# Altium PCB MSB.PcbDoc
Units mil, origin at the board's own origin, x right, y up, seen from the top; angles counter-clockwise.
Board outline 1540 x 1600 mil, 2 copper layers (Top Layer, Bottom Layer); 25 components, 22 nets, 112 pads, 13 vias.
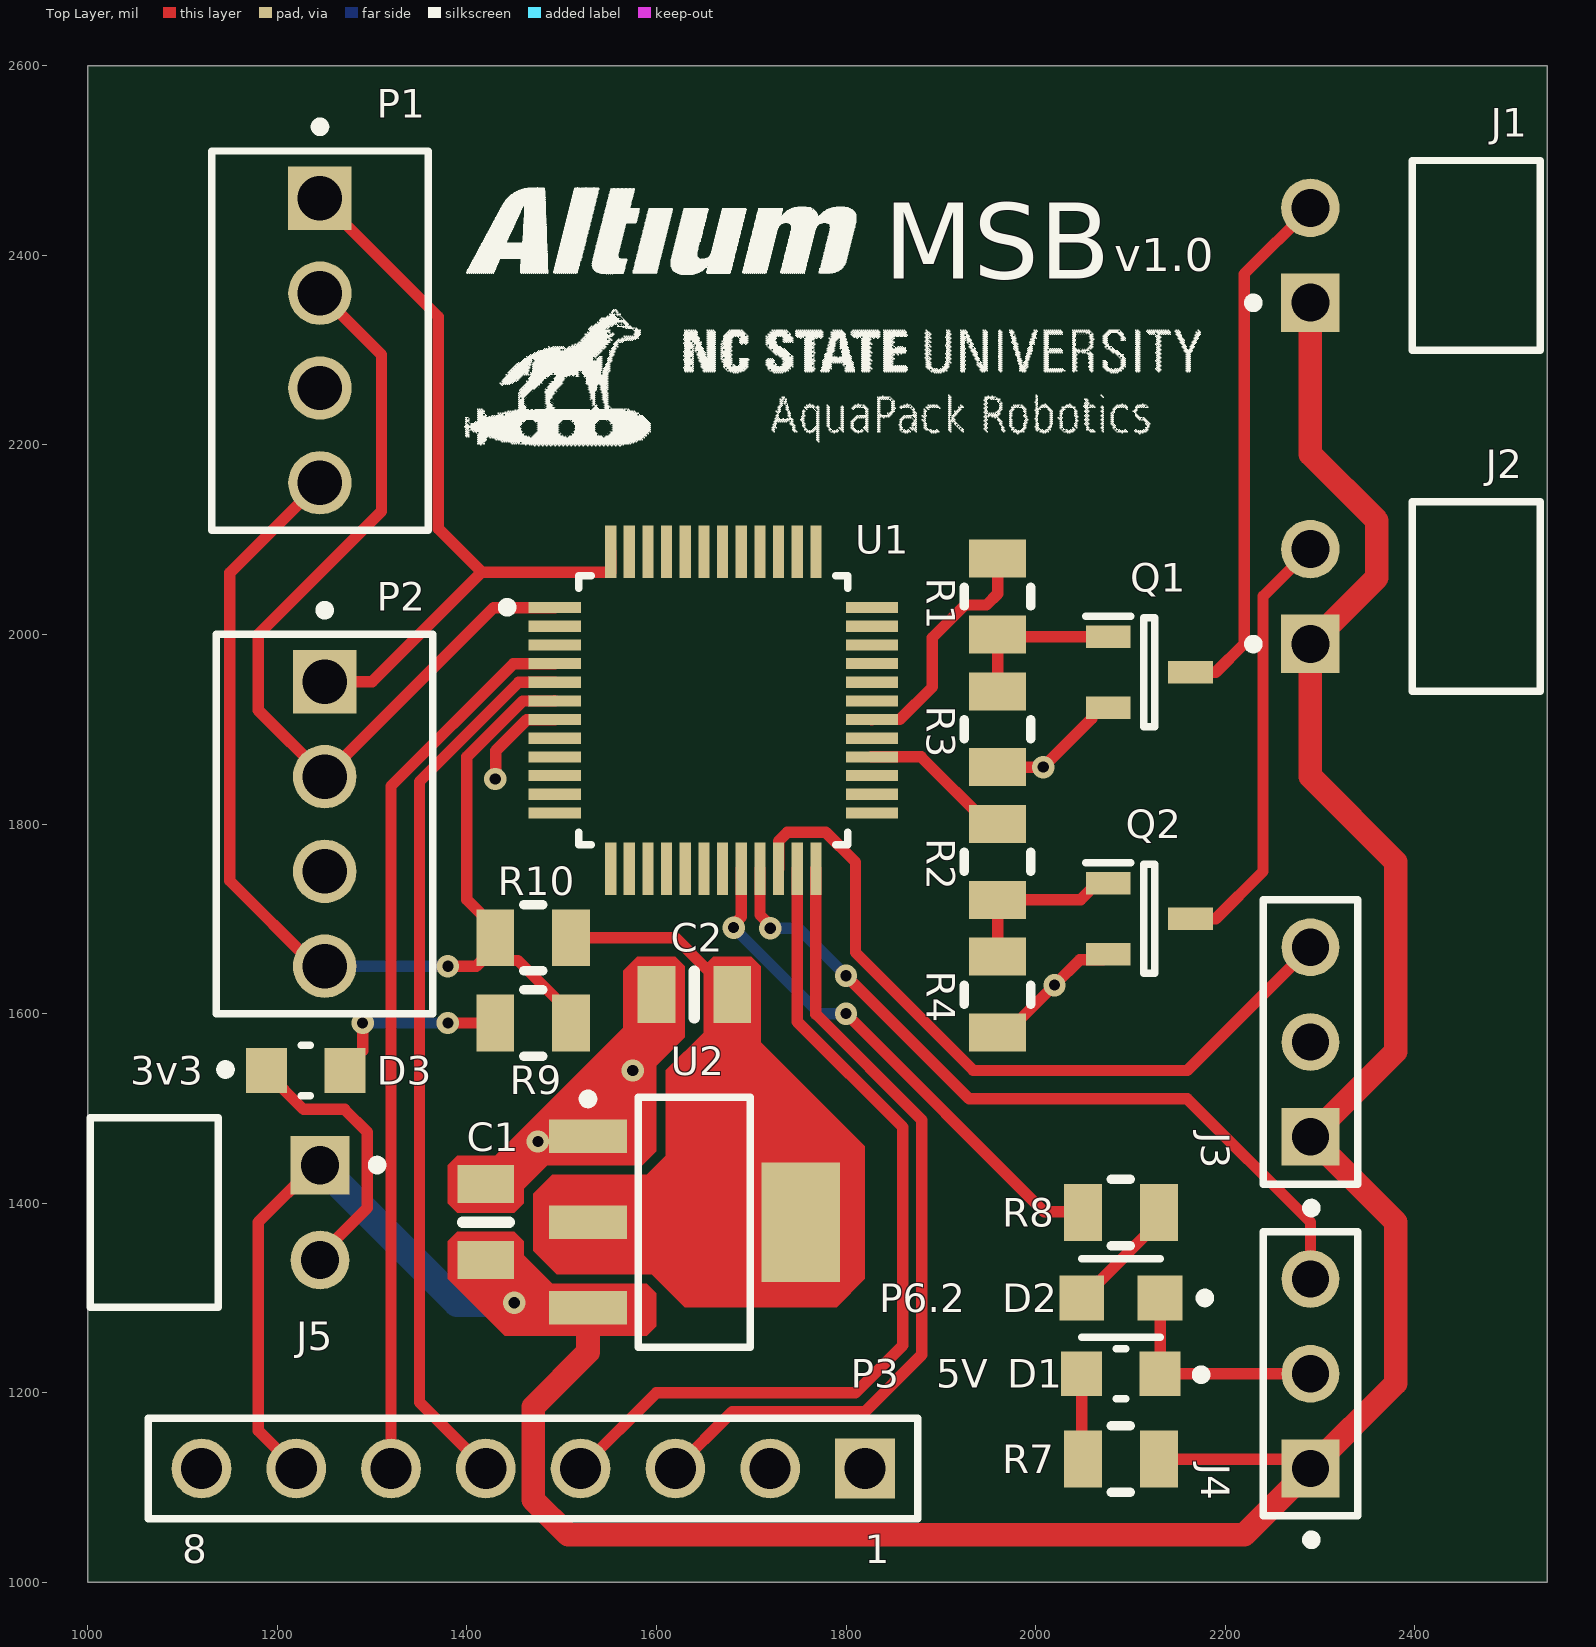
[diagram p0: Top Layer view]
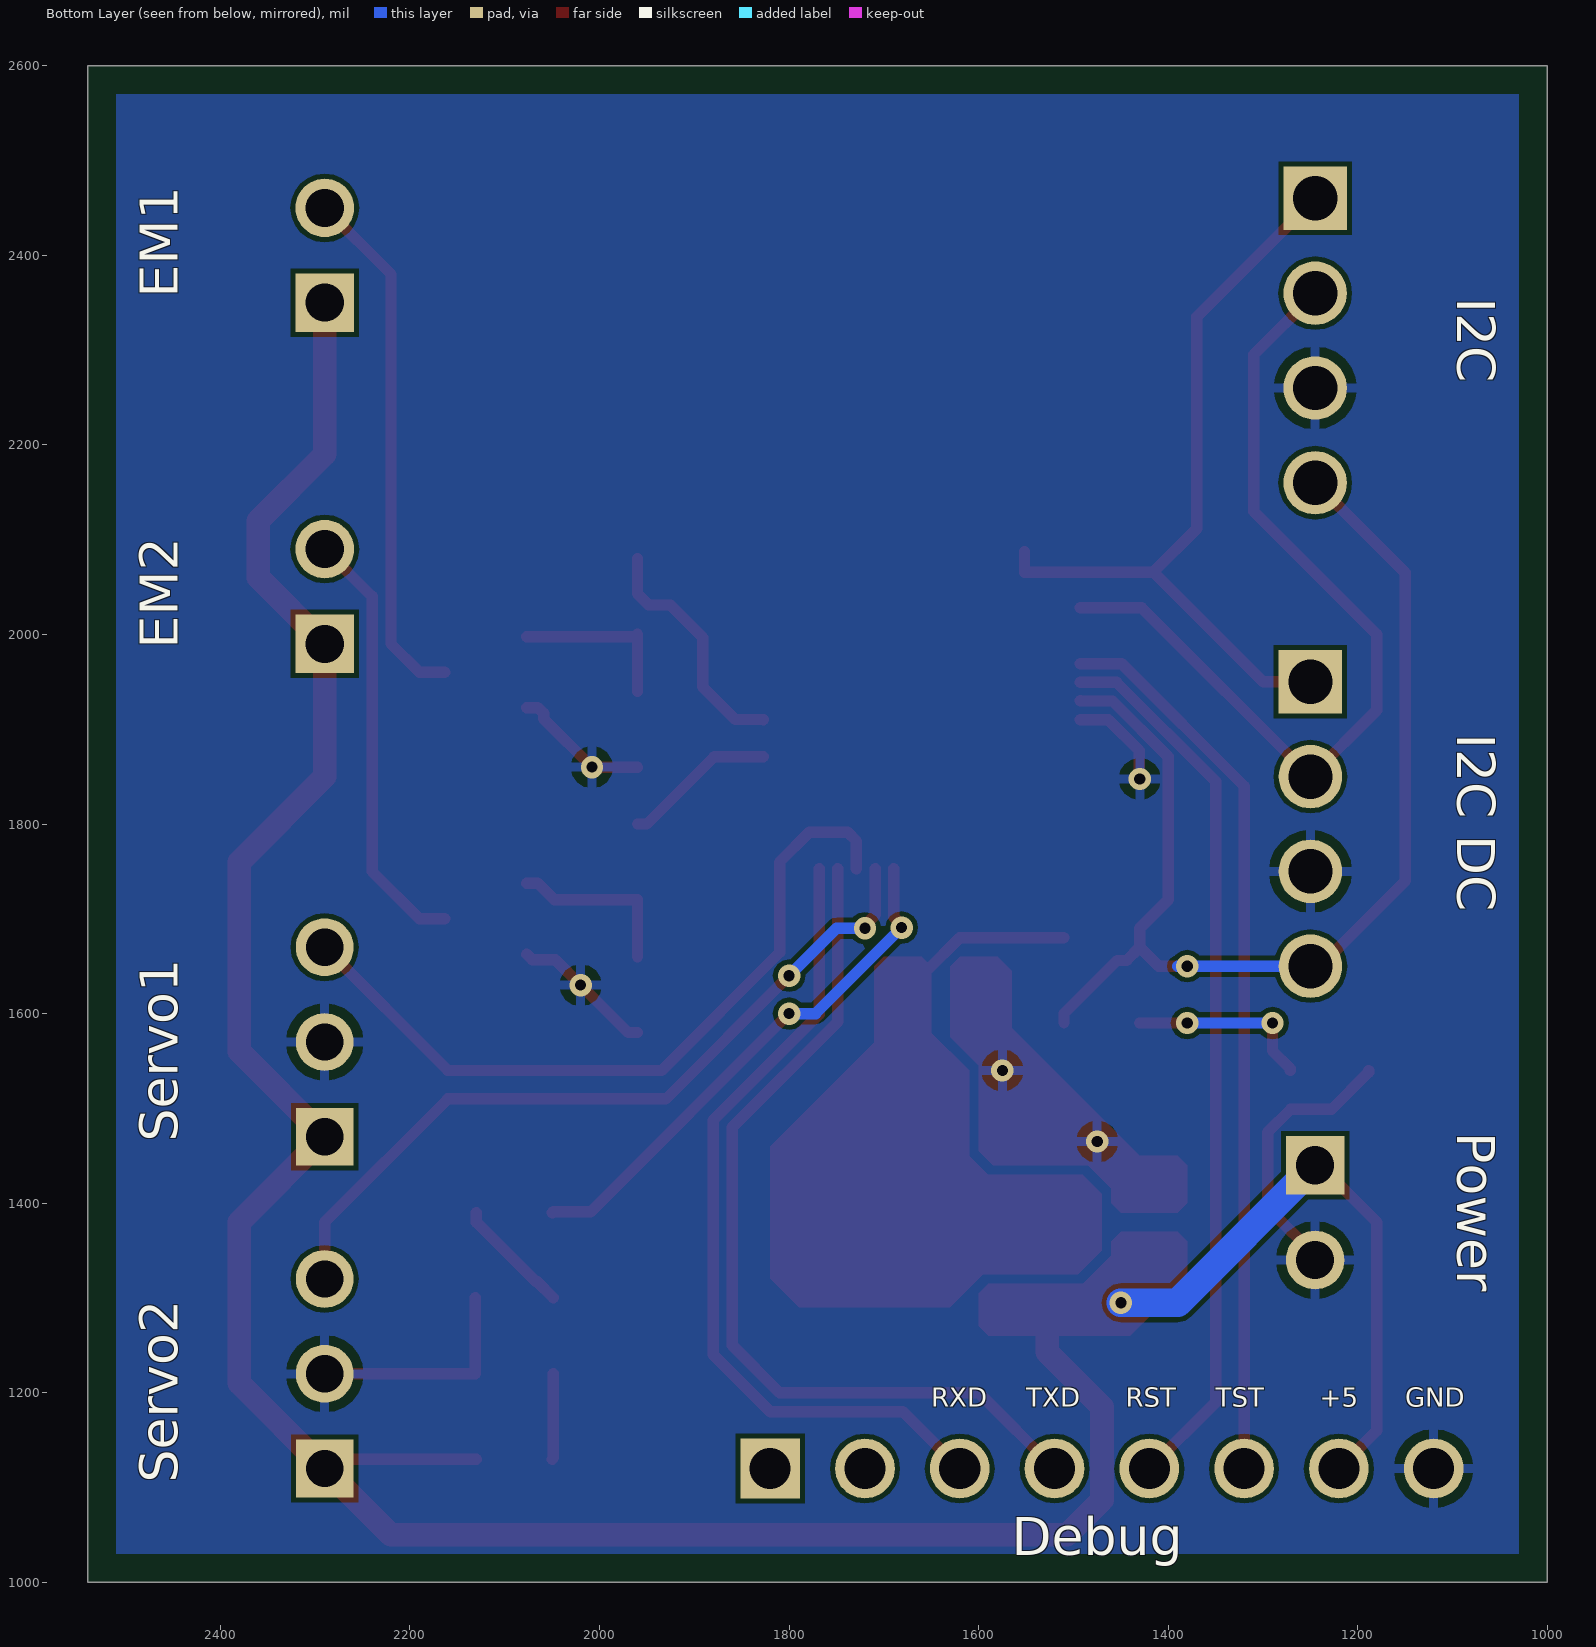
[diagram p1: Bottom Layer view, seen from below]
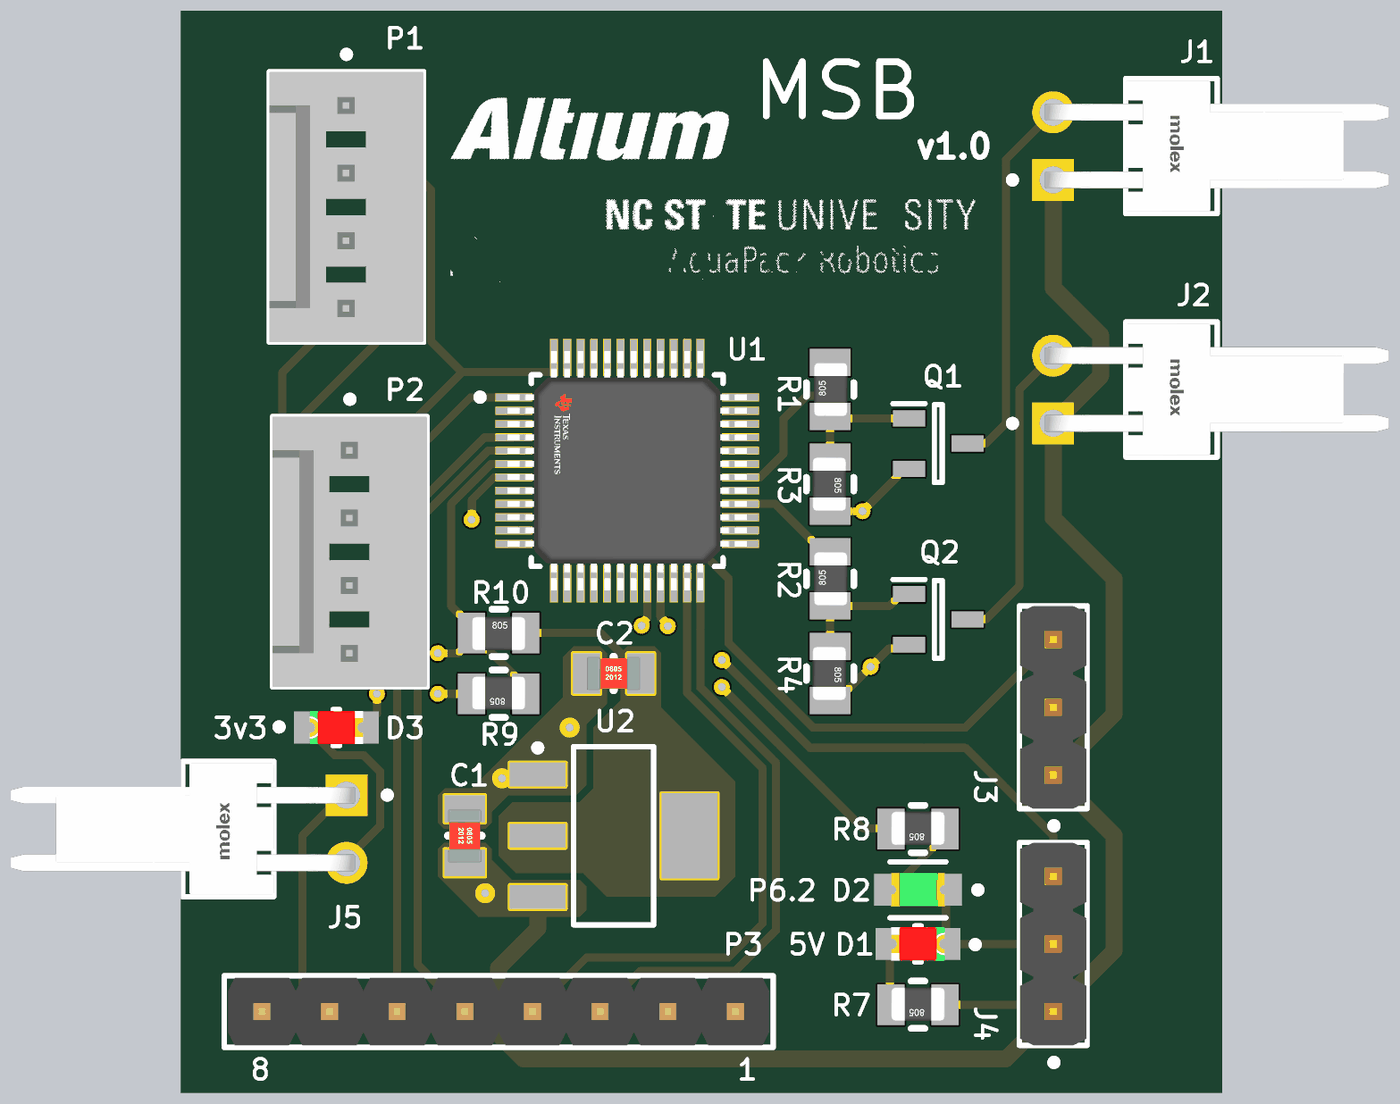
[diagram p2: 3D render of the assembled board from above, using the file's embedded part models]

## Layer stack, top to bottom
Top Solder: solder mask 0.4, Solder Resist, Dk 3.5
Top Layer: signal copper 1.4
Dielectric 1: dielectric 12.6, FR-4, Dk 4.8
Bottom Layer: signal copper 1.4
Bottom Solder: solder mask 0.4, Solder Resist, Dk 3.5

## Board outline
1000,1000 2540,1000 2540,2600 1000,2600

## Design rules (kind name [scope] priority, off if disabled: settings)
BoardOutlineClearance [All] p1: gap=7.87 ignorepadtopadclearanceinfootprint=FALSE
Clearance [All] p1: gap=5 ignorepadtopadclearanceinfootprint=FALSE except(9.84: Arc-Hole Track-Hole SMDPad-Hole THPad-Hole Via-Hole Fill-Hole Poly-Hole Region-Hole Text-Hole)
ComponentClearance [All] p1: gap=5 collisioncheckmode=3 verticalgap=5 showdistances=TRUE
DiffPairsRouting [All] p1: maxlimit=10 minlimit=5 mostfreqgap=5 toplayer_minwidth=5 toplayer_maxwidth=1000 toplayer_prefwidth=5 bottomlayer_minwidth=5 bottomlayer_maxwidth=1000 bottomlayer_prefwidth=5 maxuncoupledlength=500
Height [All] p1: minheight=0 maxheight=71497.94 prefheight=500
HoleSize [All] p1: absolutevalues=TRUE maxlimit=248.03 minlimit=11.81 maxpercent=80.000 minpercent=20.000
HoleToHoleClearance [All] p1: gap=9.84 allowstackedmicrovias=FALSE
MinimumAnnularRing [All] p1: minimumring=3
MinimumSolderMaskSliver [All] p1: minsoldermaskwidth=0
PlaneClearance [All] p1: clearance=5
PlaneConnect PlaneConnectPowerPads [InPadClass('PowerPads')] p1: planeconnectstyle=Direct reliefexpansion=20 reliefentries=4 reliefconductorwidth=10 reliefairgap=10
PlaneConnect [All] p2: pad.planeconnectstyle=Relief pad.reliefexpansion=11.81 pad.reliefentries=4 pad.reliefconductorwidth=5 pad.reliefairgap=5 via.planeconnectstyle=Direct via.reliefexpansion=11.81 via.reliefentries=4 via.reliefconductorwidth=5 via.reliefairgap=5
PolygonConnect PolygonConnect_1 [All] p1: connectstyle=Relief reliefconductorwidth=10 reliefentries=4 polygonreliefangle="90 Angle" airgapwidth=10
PolygonConnect PolygonDirect [(IsNamedPolygon('PolygonDirect'))] p2: connectstyle=Direct reliefconductorwidth=10 reliefentries=4 polygonreliefangle="90 Angle" airgapwidth=10
PolygonConnect [All] p3: thpad.connectstyle=Relief thpad.reliefconductorwidth=5 thpad.reliefentries=4 thpad.polygonreliefangle="90 Angle" thpad.airgapwidth=5 smdpad.connectstyle=Relief smdpad.reliefconductorwidth=5 smdpad.reliefentries=4 smdpad.polygonreliefangle="90 Angle" smdpad.airgapwidth=5 via.connectstyle=Direct via.reliefconductorwidth=5 via.reliefentries=4 via.polygonreliefangle="90 Angle" via.airgapwidth=5
RoutingVias [All] p1: holewidth=11.81 width=23.62 viastyle="Through Hole" minholewidth=11.81 minwidth=23.62 maxholewidth=23.62 maxwidth=259.84
SilkToSilkClearance [All] p1: silktosilkclearance=0
SilkToSolderMaskClearance [IsPad] p1: minsilkscreentomaskgap=5 clearancetoexposedcopper=TRUE
SolderMaskExpansion [All] p1: expansion=2.95 istentingtop=FALSE
Width [All] p1: maxlimit=1000 minlimit=12 preferedwidth=12 minimp=50.000000 maximp=50.000000 favimp=50.000000
20 further rules are at their usual default settings.

## Components (designator, comment, footprint, x,y, rotation, side; value= is the part's Value field where it differs from the comment)
C1 "100pF" SMD-0805C 1420,1380 r180 top
C2 "10µF" SMD-0805C 1640,1620 r270 top
D1 "1.9V" FP-150080SS75000-MFG 2090,1220 r180 top
D2 "2.2V" FP-LTST-C171GKT-MFG 2090,1300 r180 top value=2.1V
D3 "1.9V" FP-150080SS75000-MFG 1230,1540 r0 top
J1 "22-05-3021" FP-22-05-3021-MFG 2460,2400 r90 top
J2 "22-05-3021" FP-22-05-3021-MFG 2460,2040 r90 top
J3 "90120-0763" FP-90120-0763-MFG 2290,1570 r90 top
J4 "90120-0763" FP-90120-0763-MFG 2290,1220 r90 top
J5 "22-05-3021" FP-22-05-3021-MFG 1075,1390 r270 top
P1 "22-27-2041" MOLX-22-27-2041_V 1245,2310 r90 top
P2 "22-27-2041" MOLX-22-27-2041_V 1250,1800 r90 top
P3 "61300811121" 61300811121 1470,1120 r180 top
Q1 "FDN5632N-F085" SOT95P237X122-3N 2120,1960 r0 top
Q2 "FDN5632N-F085" SOT95P237X122-3N 2120,1700 r0 top
R1 "200" SMD-0805-RES 1960,2040 r0 top
R2 "200" SMD-0805-RES 1960,1760 r0 top
R3 "10k" SMD-0805-RES 1960,1900 r180 top
R4 "10k" SMD-0805-RES 1960,1620 r180 top
R7 "309" SMD-0805-RES 2090,1130 r90 top
R8 "76.8" SMD-0805-RES 2090,1390 r90 top
R9 "140" SMD-0805-RES 1470,1590 r90 top
R10 "0.0" SMD-0805-RES 1470,1680 r270 top
U1 "MSP430FR2355TPTR" FP-PT0048A-MFG 1660,1920 r0 top
U2 "LD1117S33TR" SOT-223_L 1640,1380 r0 top

## Footprints (in the part's own frame and the unit in brackets; to place one, negate y for a bottom-side part, rotate by r counter-clockwise, add the part's x,y. Pads: shape width x height; smd on the part's side, far side on the other; paste and mask are expansions set on the pad)
61300811121 [mm] "Pin Header, pitch 2.54 mm, THT, Vertical, single row, 8p"
  rect 1.6x1.6 hole 1.1: 1(-8.89,0)
  round 1.6 hole 1.1: 2(-6.35,0) 3(-3.81,0) 4(-1.27,0) 5(1.27,0) 6(3.81,0) 7(6.35,0) 8(8.89,0)
  silkscreen extent -10.31,-1.35 10.31,1.35, body extent -10.16,-1.27 10.16,1.27, height 8.57
FP-22-05-3021-MFG [mm]
  rect 1.57x1.57 hole 1.02 paste-1000 mask+0: 1(-1.27,4.32)
  round 1.57 hole 1.02 paste-1000 mask+0: 2(1.27,4.32)
  silkscreen extent -2.54,-1.84 2.54,5.97, body extent -2.64,-8.9 2.64,5.21, height 0.25
FP-90120-0763-MFG [mm]
  rect 1.55x1.55 hole 1 paste-1000 mask+0: 1(-2.54,0)
  round 1.55 hole 1 paste-1000 mask+0: 2(0,0) 3(2.54,0)
  silkscreen extent -4.57,-1.27 3.81,1.27, body extent -3.91,-1.37 3.91,1.37, height 0.25
FP-150080SS75000-MFG [mm]
  rect 1.1x1.2 smd paste+0 mask+0: 1(-1.05,0) 2(1.05,0)
  silkscreen extent -2.28,-0.67 0.13,0.67, body extent -1.7,-0.77 1.7,0.77, height 0.25
FP-LTST-C171GKT-MFG [mm]
  rect 1.2x1.2 smd paste+0 mask+0: 1(-1.05,0) 2(1.05,0)
  silkscreen extent -2.38,-1.05 1.05,1.05, body extent -1.75,-0.77 1.75,0.77, height 0.25
FP-PT0048A-MFG [mm]
  rect 1.4x0.3 smd paste-1000 mask+0: 1(-4.25,2.75) 2(-4.25,2.25) 3(-4.25,1.75) 4(-4.25,1.25) 5(-4.25,0.75) 6(-4.25,0.25) 7(-4.25,-0.25) 8(-4.25,-0.75) 9(-4.25,-1.25) 10(-4.25,-1.75) 11(-4.25,-2.25) 12(-4.25,-2.75) 25(4.25,-2.75) 26(4.25,-2.25) 27(4.25,-1.75) 28(4.25,-1.25) 29(4.25,-0.75) 30(4.25,-0.25) 31(4.25,0.25) 32(4.25,0.75) 33(4.25,1.25) 34(4.25,1.75) 35(4.25,2.25) 36(4.25,2.75)
  rect 0.3x1.4 smd paste-1000 mask+0: 13(-2.75,-4.25) 14(-2.25,-4.25) 15(-1.75,-4.25) 16(-1.25,-4.25) 17(-0.75,-4.25) 18(-0.25,-4.25) 19(0.25,-4.25) 20(0.75,-4.25) 21(1.25,-4.25) 22(1.75,-4.25) 23(2.25,-4.25) 24(2.75,-4.25) 37(2.75,4.25) 38(2.25,4.25) 39(1.75,4.25) 40(1.25,4.25) 41(0.75,4.25) 42(0.25,4.25) 43(-0.25,4.25) 44(-0.75,4.25) 45(-1.25,4.25) 46(-1.75,4.25) 47(-2.25,4.25) 48(-2.75,4.25)
  silkscreen extent -5.65,-3.6 3.6,3.6, body extent -5.05,-5.05 5.05,5.05, height 0.25
MOLX-22-27-2041_V [mm] "CONN, 4-Leads, Body 10.16x5.8mm, Pitch 2.54mm"
  rect 1.7x1.7 hole 1.19: 1(3.81,0)
  round 1.7 hole 1.19: 2(1.27,0) 3(-1.27,0) 4(-3.81,0)
  silkscreen extent -5.08,-2.9 5.85,2.9, body extent -5.08,-2.9 5.08,2.9, height 11.7
SMD-0805-RES [mil]
  rect 60x40 smd: 1(0,40) 2(0,-40)
  silkscreen extent -35,-10 35,10, body extent -24,-39 26,39, height 31
SMD-0805C [mil]
  rect 60x40 smd: 1(0,40) 2(0,-40)
  silkscreen extent -25,0 25,0, body extent -25,-39 25,39, height 35
SOT95P237X122-3N [mm]
  rect 1.2x0.6 smd: 1(-1.1,0.95) 2(-1.1,-0.95) 3(1.1,0)
  silkscreen extent -1.7,-1.46 0.15,1.5
SOT-223_L [mm] "SOT223, 4-Leads, Body 6.5x3.5mm, Pitch 2.3mm, Lead Span 7mm, IPC High Density"
  rect 2.1x0.9 smd: 1(-2.85,2.3) 2(-2.85,0) 3(-2.85,-2.3)
  rect 2.1x3.2 smd: 4(2.85,0)
  silkscreen extent -2.97,-3.35 1.5,3.42, body extent -1.85,-3.35 1.85,3.35, height 1.8

## Part data
C1: library part GQM2195C1H101JB01D, "CAP CER 100PF 50V NP0 0805", Manufacturer="Murata Electronics North America", Operating Temperature="-55°C ~ 125°C", Package / Case="0805 (2012 Metric)", Tolerance=±5%, Datasheet URL=http://www.murata.com/~/media/webrenewal/support/library/catalog/products/capacitor/mlcc/c02e.pdf, Manufacturer Part Number=GQM2195C1H101JB01D, Mount="Surface Mount, MLCC", Packaging="Cut Tape (CT)", Quantity Available=5437, Unit Price (USD)=1.22
C2: library part GCJ21BR71A106KE01L, "CAP CER 10UF 10V X7R 0805", Manufacturer="Murata Electronics North America", Operating Temperature="-55°C ~ 125°C", Package / Case="0805 (2012 Metric)", Tolerance=±10%, Datasheet URL=http://www.murata.com/~/media/webrenewal/support/library/catalog/products/capacitor/mlcc/c03e.ashx, Manufacturer Part Number=GCJ21BR71A106KE01L, Mount="Surface Mount, MLCC", Packaging="Cut Tape (CT)", Quantity Available=2702, Unit Price (USD)=0.56
D1 D3: library part CMP-1426-00010-2, "LED RED CLEAR 0805 SMD, 150080SS75000", Color=Red, Manufacturer="Wurth Elektronik", Manufacturer Part Number=150080SS75000, Forward Voltage=1.9V, Luminous Intensity=60mcd, Mount="Surface Mount", Packaging="Cut Tape"
D2: library part CMP-22017-000007-1, "LED GREEN CLEAR CHIP SMD, LTST-C171GKT", Color=Green, Forward Voltage=2.1V, Manufacturer=Vishay, Manufacturer Part Number=LTST-C171GKT, Luminous Intensity=12mcd, Mount="Surface Mount", Packaging="Tape and Reel"
J1 J2 J5: library part CMP-04776-000166-1, "CONN HEADER R/A 2POS 2.54MM", Color=White, Manufacturer=Molex, Manufacturer Part Number=22-05-3021, Mount="Through Hole", Orientation="Right Angle", Packaging=Bulk, Pitch=2.54mm
J3 J4: library part CMP-04776-000084-1, "CONN HEADER VERT 3POS 2.54MM", Manufacturer=Molex, Datasheet URL=https://www.molex.com/webdocs/datasheets/pdf/en-us/0901200763_PCB_HEADERS.pdf, Manufacturer Part Number=90120-0763, Mount="Board-To-Board Connector, C-Grid III 90120 Series, Through Hole, Header, 3, 2.54 mm", Pitch=2.54mm
P1 P2: library part CMP-2000-05243-1, "Male Header, Pitch 2.54 mm, 1 x 4 Position, Height 11.7 mm, Tail Length 3.56 mm, RoHS, Bulk", Manufacturer=Molex, Operating Temperature=0degCto+75degC, Datasheet URL=http://www.molex.com/pdm_docs/sd/022272041_sd.pdf, Manufacturer Part Number=22-27-2041
P3: library part CMP-1502-01076-1, "THT Vertical Pin Header WR-PHD, Pitch 2.54 mm, Single Row, 8 pins", Manufacturer="Wurth Elektronik", Operating Temperature=-40to105degC, Datasheet URL=https://katalog.we-online.de/em/datasheet/6130xx11121.pdf, Manufacturer Part Number=61300811121, Mount="Through Hole", Orientation=Vertical, Packaging=Bag, Pitch=2.54mm
Q1 Q2: "MOSFET Trans MOS N-Ch 60V 1.7A", Manufacturer=Onsemi, Datasheet URL=https://www.onsemi.com/pub/Collateral/FDN5632N_F085-D.PDF, Manufacturer Part Number=FDN5632N-F085
R1 R2: library part ERJ-PB6D2000V, "RES SMD 200 OHM 0.5% 1/4W 0805", Manufacturer="Panasonic Electronic Components", Operating Temperature="-55°C ~ 155°C", Package / Case="0805 (2012 Metric)", Power (Watts)="0.25W, 1/4W", Tolerance=±0.5%, Datasheet URL=https://industrial.panasonic.com/cdbs/www-data/pdf/RDA0000/AOA0000C100.pdf, Manufacturer Part Number=ERJ-PB6D2000V, Packaging="Cut Tape (CT)", Quantity Available=10000, Unit Price (USD)=0.04968
R3 R4: library part ERJ-6ENF1002V, "RES SMD 10K OHM 1% 1/8W 0805", Manufacturer="Panasonic Electronic Components", Operating Temperature="-55°C ~ 155°C", Package / Case="0805 (2012 Metric)", Power (Watts)="0.125W, 1/8W", Tolerance=±1%, Datasheet URL=http://industrial.panasonic.com/www-cgi/jvcr13pz.cgi?E+PZ+3+AOA0002+ERJ6ENF1002V+7+WW, Manufacturer Part Number=ERJ-6ENF1002V, Packaging="Cut Tape (CT)", Quantity Available=3985614, Unit Price (USD)=0.00729
R7: library part ERJ-6ENF3090V, "RES SMD 309 OHM 1% 1/8W 0805", Manufacturer="Panasonic Electronic Components", Operating Temperature="-55°C ~ 155°C", Package / Case="0805 (2012 Metric)", Power (Watts)="0.125W, 1/8W", Tolerance=±1%, Datasheet URL=http://industrial.panasonic.com/www-cgi/jvcr13pz.cgi?E+PZ+3+AOA0002+ERJ6ENF3090V+7+WW, Manufacturer Part Number=ERJ-6ENF3090V, Packaging="Cut Tape (CT)", Quantity Available=54759, Unit Price (USD)=0.00729
R8: library part ERJ-6ENF76R8V, "RES SMD 76.8 OHM 1% 1/8W 0805", Manufacturer="Panasonic Electronic Components", Operating Temperature="-55°C ~ 155°C", Package / Case="0805 (2012 Metric)", Power (Watts)="0.125W, 1/8W", Tolerance=±1%, Datasheet URL=http://industrial.panasonic.com/www-cgi/jvcr13pz.cgi?E+PZ+3+AOA0002+ERJ6ENF76R8V+7+WW, Manufacturer Part Number=ERJ-6ENF76R8V, Packaging="Cut Tape (CT)", Quantity Available=23882, Unit Price (USD)=0.00729
R9: library part ERJ-6ENF1400V, "RES SMD 140 OHM 1% 1/8W 0805", Manufacturer="Panasonic Electronic Components", Operating Temperature="-55°C ~ 155°C", Package / Case="0805 (2012 Metric)", Power (Watts)="0.125W, 1/8W", Tolerance=±1%, Datasheet URL=http://industrial.panasonic.com/www-cgi/jvcr13pz.cgi?E+PZ+3+AOA0002+ERJ6ENF1400V+7+WW, Manufacturer Part Number=ERJ-6ENF1400V, Packaging="Cut Tape (CT)", Quantity Available=50700, Unit Price (USD)=0.00729
R10: library part ERJ-6GEY0R00V, "RES SMD 0.0 OHM JUMPER 1/8W 0805", Manufacturer="Panasonic Electronic Components", Operating Temperature="-55°C ~ 155°C", Package / Case="0805 (2012 Metric)", Power (Watts)="0.125W, 1/8W", Tolerance=Jumper, Datasheet URL=http://industrial.panasonic.com/www-cgi/jvcr13pz.cgi?E+PZ+3+AOA0001+ERJ6GEY0R00V+7+WW, Manufacturer Part Number=ERJ-6GEY0R00V, Packaging="Cut Tape (CT)", Quantity Available=1597627, Unit Price (USD)=0.00544
U1: library part CMP-04869-000010-1, "IC MCU 16BIT 32KB FRAM 48LQFP", Manufacturer="Texas Instruments", Datasheet URL=http://www.ti.com/lit/ds/symlink/msp430fr2355.pdf, Manufacturer Part Number=MSP430FR2355TPTR
U2: library part CMP-0244-00310-1, "Fixed Low Drop Positive Voltage Regulator, 3.3V, 4-Pin SOT-223, Tape and Reel", Manufacturer=Onsemi, Datasheet URL=http://www.st.com/internet/com/TECHNICAL_RESOURCES/TECHNICAL_LITERATURE/DATASHEET/CD00000544.pdf, Manufacturer Part Number=LD1117S33TR

## Via types
v1: diameter 23.62, hole 11.81, Top Layer to Bottom Layer, 13 vias

## Nets (pads, with @x,y where several pads share a name; then routed paths per layer and width w, separated by ;. In a path a pad name is that pad's centre, name@x,y a point inside that pad or via, vN(x,y) a via of type N, cw(c..) or ccw(c..) an arc to the next point about the centre after c; other vN are vias at no path point)
+3V3: P1.4 P2.4 R9.2 R10.2 U1.6 | length 1244.3
  Top Layer w12: P2.4@1240,1650 1150,1740 1150,2065 P1.4 ; v1(1380,1650) 1410,1650 R10.2@1430,1670 ; U1.6 1492.58,1929.75 1458.89,1929.75 1400,1870.86 1400,1720 1430,1690 R10.2 R10.2@1430,1670 ; R9.2 1510,1600 1454,1656 1444,1656 R10.2@1430,1670
  Bottom Layer w12: P2.4@1240,1650 v1@1390,1650
+5: C1.1 J1.1 J2.1 J3.1 J4.1 J5.1 P3.7 R7.2 U2.3 | length 3318.4
  Top Layer w12: P3.7 1180,1160 1180,1380 J5.1@1240,1440 ; R7.2 2280,1130 J4.1
  Top Layer w25: U2.3 1527.8,1242.8 1470,1185 1470,1087.03 1507.03,1050 2220,1050 J4.1 2380,1210 2380,1380 J3.1 2380,1560 2380,1760 2289.9,1850.1 J2.1 2360,2060.1 2360,2120 2289.9,2190.1 J1.1
  Bottom Layer w30: J5.1 1390.1,1295 v1(1450,1295)
DROP1_CTRL: R1.1 U1.30 | length 255.3
  Top Layer w12: U1.30 1827.42,1910.25 1856.75,1910.25 1891.1,1944.6 1891.1,1996.65 1925.44,2031 1948.17,2031 1960,2042.83 R1.1
DROP2_CTRL: R2.1 U1.28 | length 162
  Top Layer w12: U1.28 1879.21,1870.79 1950,1800 R2.1
GND: C1.2 C2.2 D1.1 D2.1 D3.1 J3.2 J4.2 J5.2 P1.3 P2.3 P3.8 Q1.2 Q2.2 R3.1 R4.1 U1.7 U2.1 | length 933.6
  Top Layer w12: D3.1 1188.66,1538.03 1227.77,1498.92 1271.08,1498.92 1295,1475 1295,1395 J5.2@1240,1340 ; v1(1430,1847.48) 1430.48,1847.96 1430.48,1877.29 1463.25,1910.06 1492.58,1910.06 U1.7 ; R4.1 1970,1580 v1(2020,1630) 2046.79,1656.79 2070.88,1656.79 Q2.2 ; R3.1 v1(2008,1860) 2059.07,1911.07 2059.07,1916.79 2064.88,1922.6 Q1.2 ; D2.1 D1.1 J4.2
  other v1: 1475,1465 1575,1540
NetC2_1: C2.1 R10.1 U2.2 U2.4 | length 200.7
  Top Layer w12: R10.1 1620,1680 1656,1644 1666,1644 1680,1630 C2.1
NetD1_2: D1.2 R7.1 | length 90.6
  Top Layer w12: D1.2 2048.66,1131.34 R7.1
NetD2_2: D2.2 R8.2 | length 124.5
  Top Layer w12: D2.2 2066.28,1317.62 2067.62,1317.62 2130,1380 R8.2
NetD3_2: D3.2 R9.1 | length 197.7
  Top Layer w12: D3.2 1271.34,1541.97 1290,1560.63 v1(1290,1590) ; v1(1380,1590) R9.1
  Bottom Layer w12: v1(1290,1590) v1(1380,1590)
NetJ1_2: J1.2 Q1.3 | length 558.1
  Top Layer w12: Q1.3 2190,1960 2220,1990 2220,2380.1 J1.2
NetJ2_2: J2.2 Q2.3 | length 458.1
  Top Layer w12: Q2.3 2190,1700 2240,1750 2240,2040.1 J2.2
NetQ1_1: Q1.1 R1.2 R3.2 | length 177.8
  Top Layer w12: R3.2 R1.2 1962.6,1997.4 Q1.1
NetQ2_1: Q2.1 R2.2 R4.2 | length 183.9
  Top Layer w12: R4.2 R2.2 2047.48,1720 2064.88,1737.4 Q2.1
NetR8_1: R8.1 U1.20 | length 559.5
  Top Layer w12: v1@1682.05,1690 v1(1681.39,1690.66) 1681.39,1693.81 1689.53,1701.95 U1.20 ; v1(1800,1600) 2009.03,1390.97 2049.03,1390.97 R8.1
  Bottom Layer w12: v1(1681.39,1690.66) 1772.05,1600 v1(1800,1600)
RST: P3.5 U1.5 | length 939.9
  Top Layer w12: P3.5 1350,1190 1350,1844.9 1454.53,1949.43 1492.58,1949.43 U1.5
RXD: P3.3 U1.24 | length 868.7
  Top Layer w12: P3.3 1680,1180 1820,1180 1880,1240 1880,1487.74 1768.27,1599.47 U1.24
SCL: P1.1 P2.1 U1.48 | length 836.2
  Top Layer w12: P1.1 1370,2335 1370,2111.53 1415.76,2065.76 ; P2.1 1300,1950 1415.76,2065.76 ; U1.48 1551.73,2065.86 1551.64,2065.76 1415.76,2065.76
SDA: P1.2 P2.2 U1.1 | length 936.3
  Top Layer w12: P1.2 1310,2295 1310,2130 1180,2000 1180,1920 P2.2 1428.17,2028.17 1492.58,2028.17 U1.1
SERVO1_CTRL: J3.3 U1.22 | length 808.1
  Top Layer w12: U1.22 1728.99,1752.77 1728.99,1782.11 1738.12,1791.24 1778.73,1791.24 1810,1759.97 1810,1664.44 1934.44,1540 2160,1540 J3.3
SERVO2_CTRL: J4.3 U1.21 | length 825.6
  Top Layer w12: U1.21 1709.21,1703.93 1720,1693.14 v1(1720,1690) ; v1(1800,1640) 1930,1510 2160,1510 2290,1380 J4.3
  Bottom Layer w12: v1(1720,1690) 1750,1690 v1(1800,1640)
TST: P3.6 U1.4 | length 946.2
  Top Layer w12: P3.6 1320,1840 1449.12,1969.12 1492.58,1969.12 U1.4
TXD: P3.4 U1.23 | length 942.7
  Top Layer w12: P3.4 1600,1200 1810,1200 1860,1250 1860,1480 1748.58,1591.42 U1.23
pads on no net: P3.1 P3.2 U1.2 U1.3 U1.8 U1.9 U1.10 U1.11 U1.12 U1.13 U1.14 U1.15 U1.16 U1.17 U1.18 U1.19 U1.25 U1.26 U1.27 U1.29 U1.31 U1.32 U1.33 U1.34 U1.35 U1.36 U1.37 U1.38 U1.39 U1.40 U1.41 U1.42 U1.43 U1.44 U1.45 U1.46 U1.47

## Polygon pours and split planes (outlines as drawn)
GND on Bottom Layer "GND_L02_P003" (solid, pour order 3): 1030,2570 2510,2570 2510,1030 1030,1030

## Other copper
Top Layer:
  region net NetC2_1: 1710,1650 1700,1660 1660,1660 1650,1650 1650,1580 1610,1540 1610,1450 1590,1430 1490,1430 1470,1410 1470,1350 1495,1325 1595,1325 1630,1290 1790,1290 1820,1320 1820,1460 1710,1570
  region net +5: 1390,1370 1450,1370 1460,1360 1460,1345 1490,1315 1590,1315 1600,1305 1600,1270 1590,1260 1440,1260 1380,1320 1380,1360
  region net GND: 1380,1400 1390,1390 1450,1390 1460,1400 1460,1415 1485,1440 1585,1440 1600,1455 1600,1545 1630,1575 1630,1650 1620,1660 1580,1660 1565,1645 1565,1585 1430,1450 1390,1450 1380,1440

## Silkscreen, mask and mechanical layers (free items; w line width, h text height)
Top Overlay:
  drawing of 147 lines, arcs and shapes, not listed
  text "v1.0" at 2083,2383 h35
  text "MSB" at 1840,2375 h80
  text "3v3" at 1045,1525 h30
  text "P6.2" at 1835,1285 h30
  text "5V" at 1895,1205 h30
Bottom Overlay:
  text "I2C" at 1095,2355 h40 r90
  text "EM1" at 2445,2355 h40 r270
  text "EM2" at 2445,1985 h40 r270
  text "I2C DC" at 1095,1895 h40 r90
  text "Power" at 1095,1475 h40 r90
  text "Servo1" at 2445,1465 h40 r270
  text "GND" at 1150,1185 h20
  text "+5" at 1240,1185 h20
  text "TST" at 1350,1185 h20
  text "RST" at 1445,1185 h20
  text "TXD" at 1550,1185 h20
  text "RXD" at 1650,1185 h20
  text "Servo2" at 2445,1105 h40 r270
  text "Debug" at 1565,1028.33 h40

## Text inside footprints (layer, text, board x,y; h text height)
P3: Top Overlay "8" at 1100,1020 h30; Top Overlay "1" at 1820,1020 h30